# Altium PCB Supply_part.PcbDoc
Units mm, origin at the board's own origin, x right, y up, seen from the top; angles counter-clockwise.
Board outline 50 x 50 mm, 2 copper layers (Top Layer, Bottom Layer); 25 components, 34 nets, 112 pads, 1 vias.
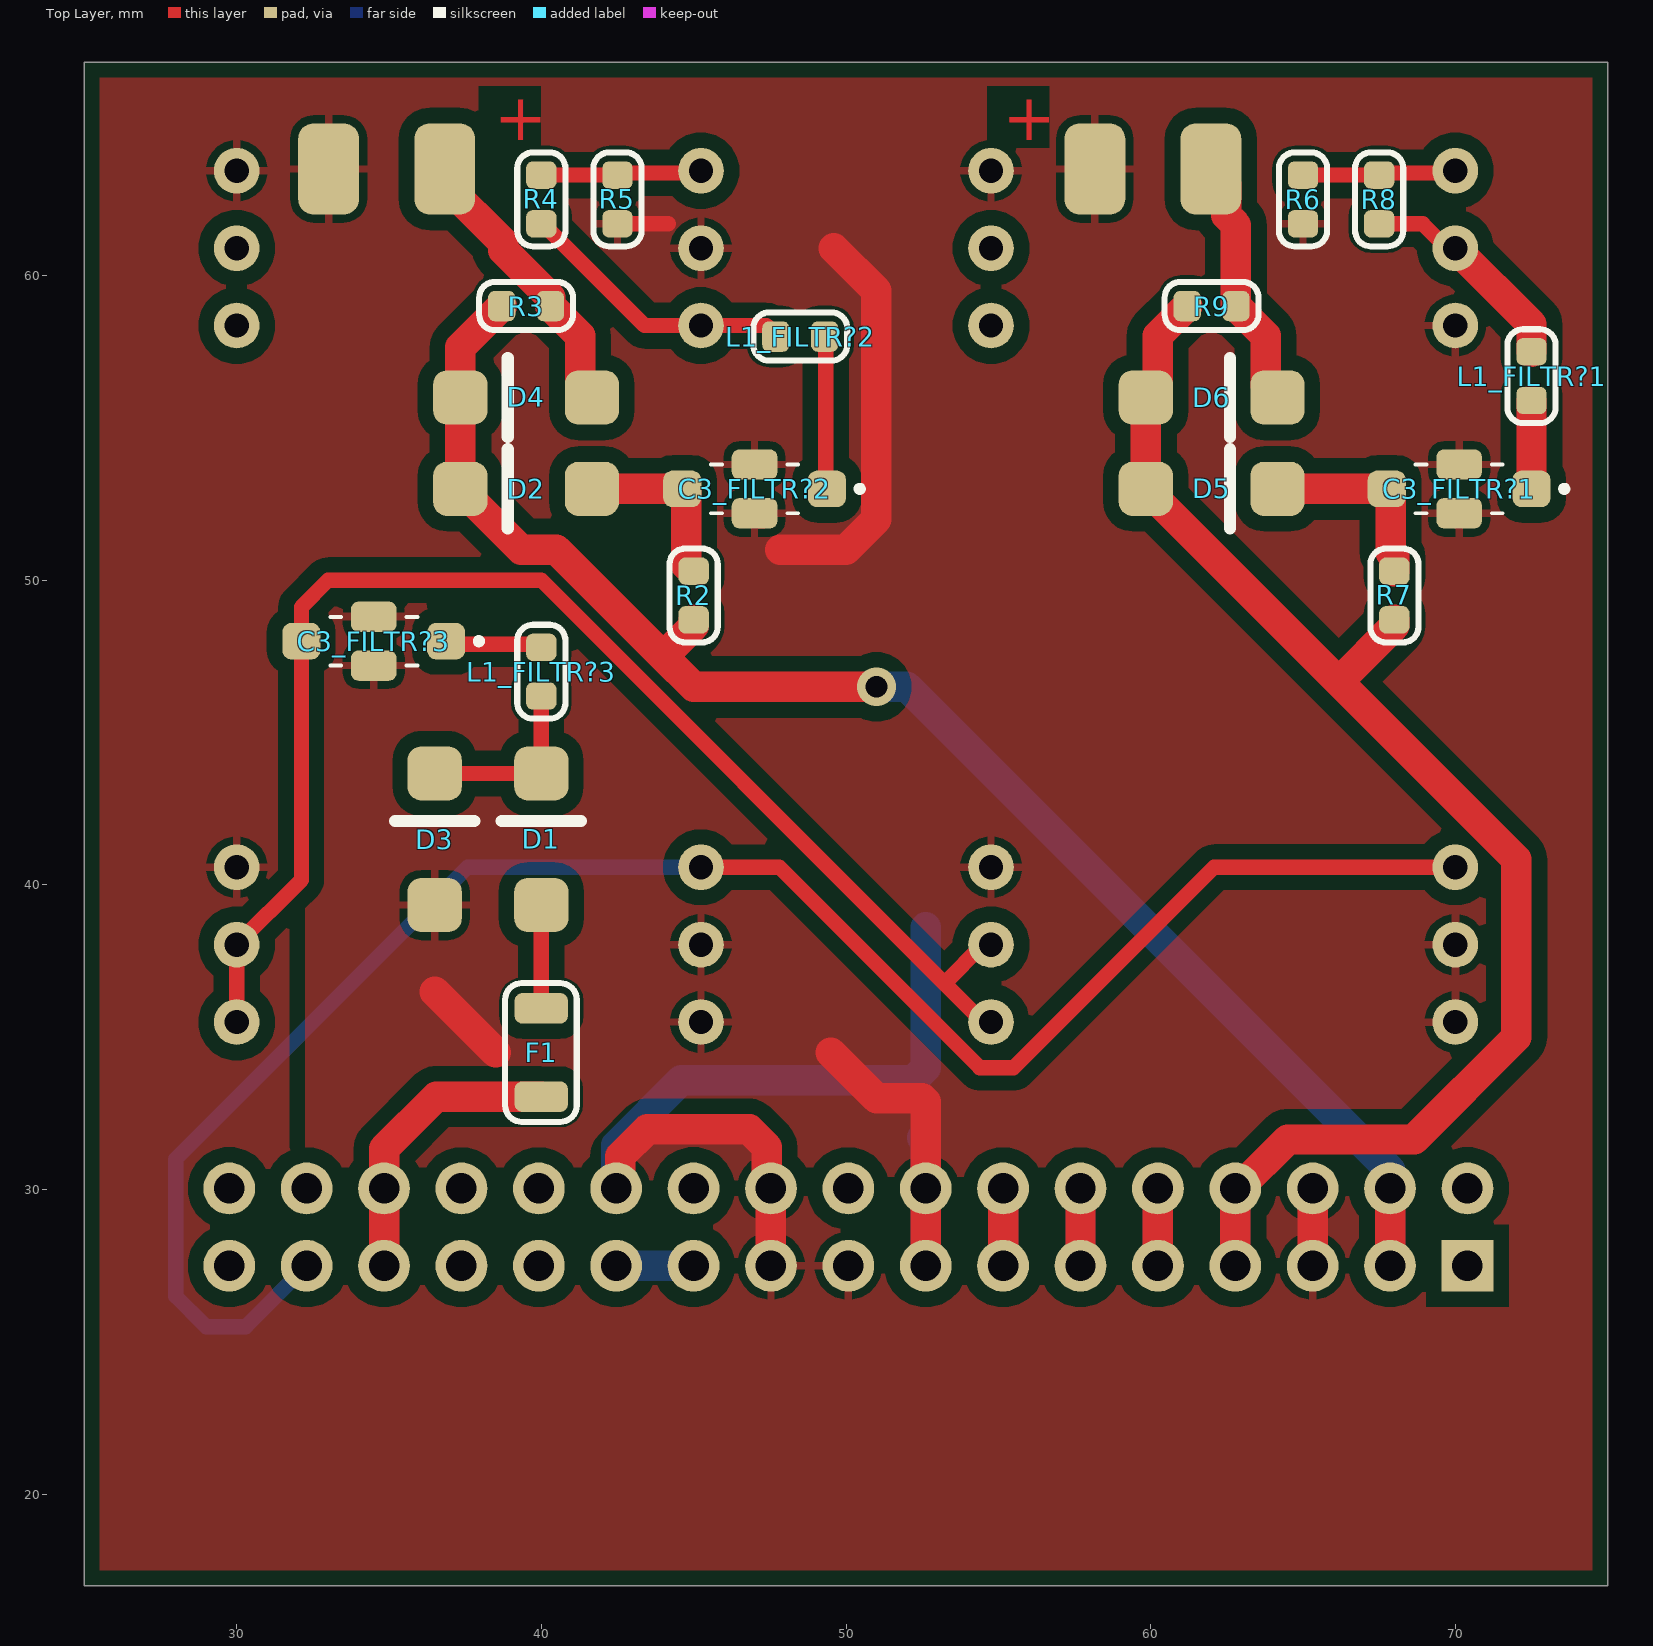
[diagram p0: Top Layer view]
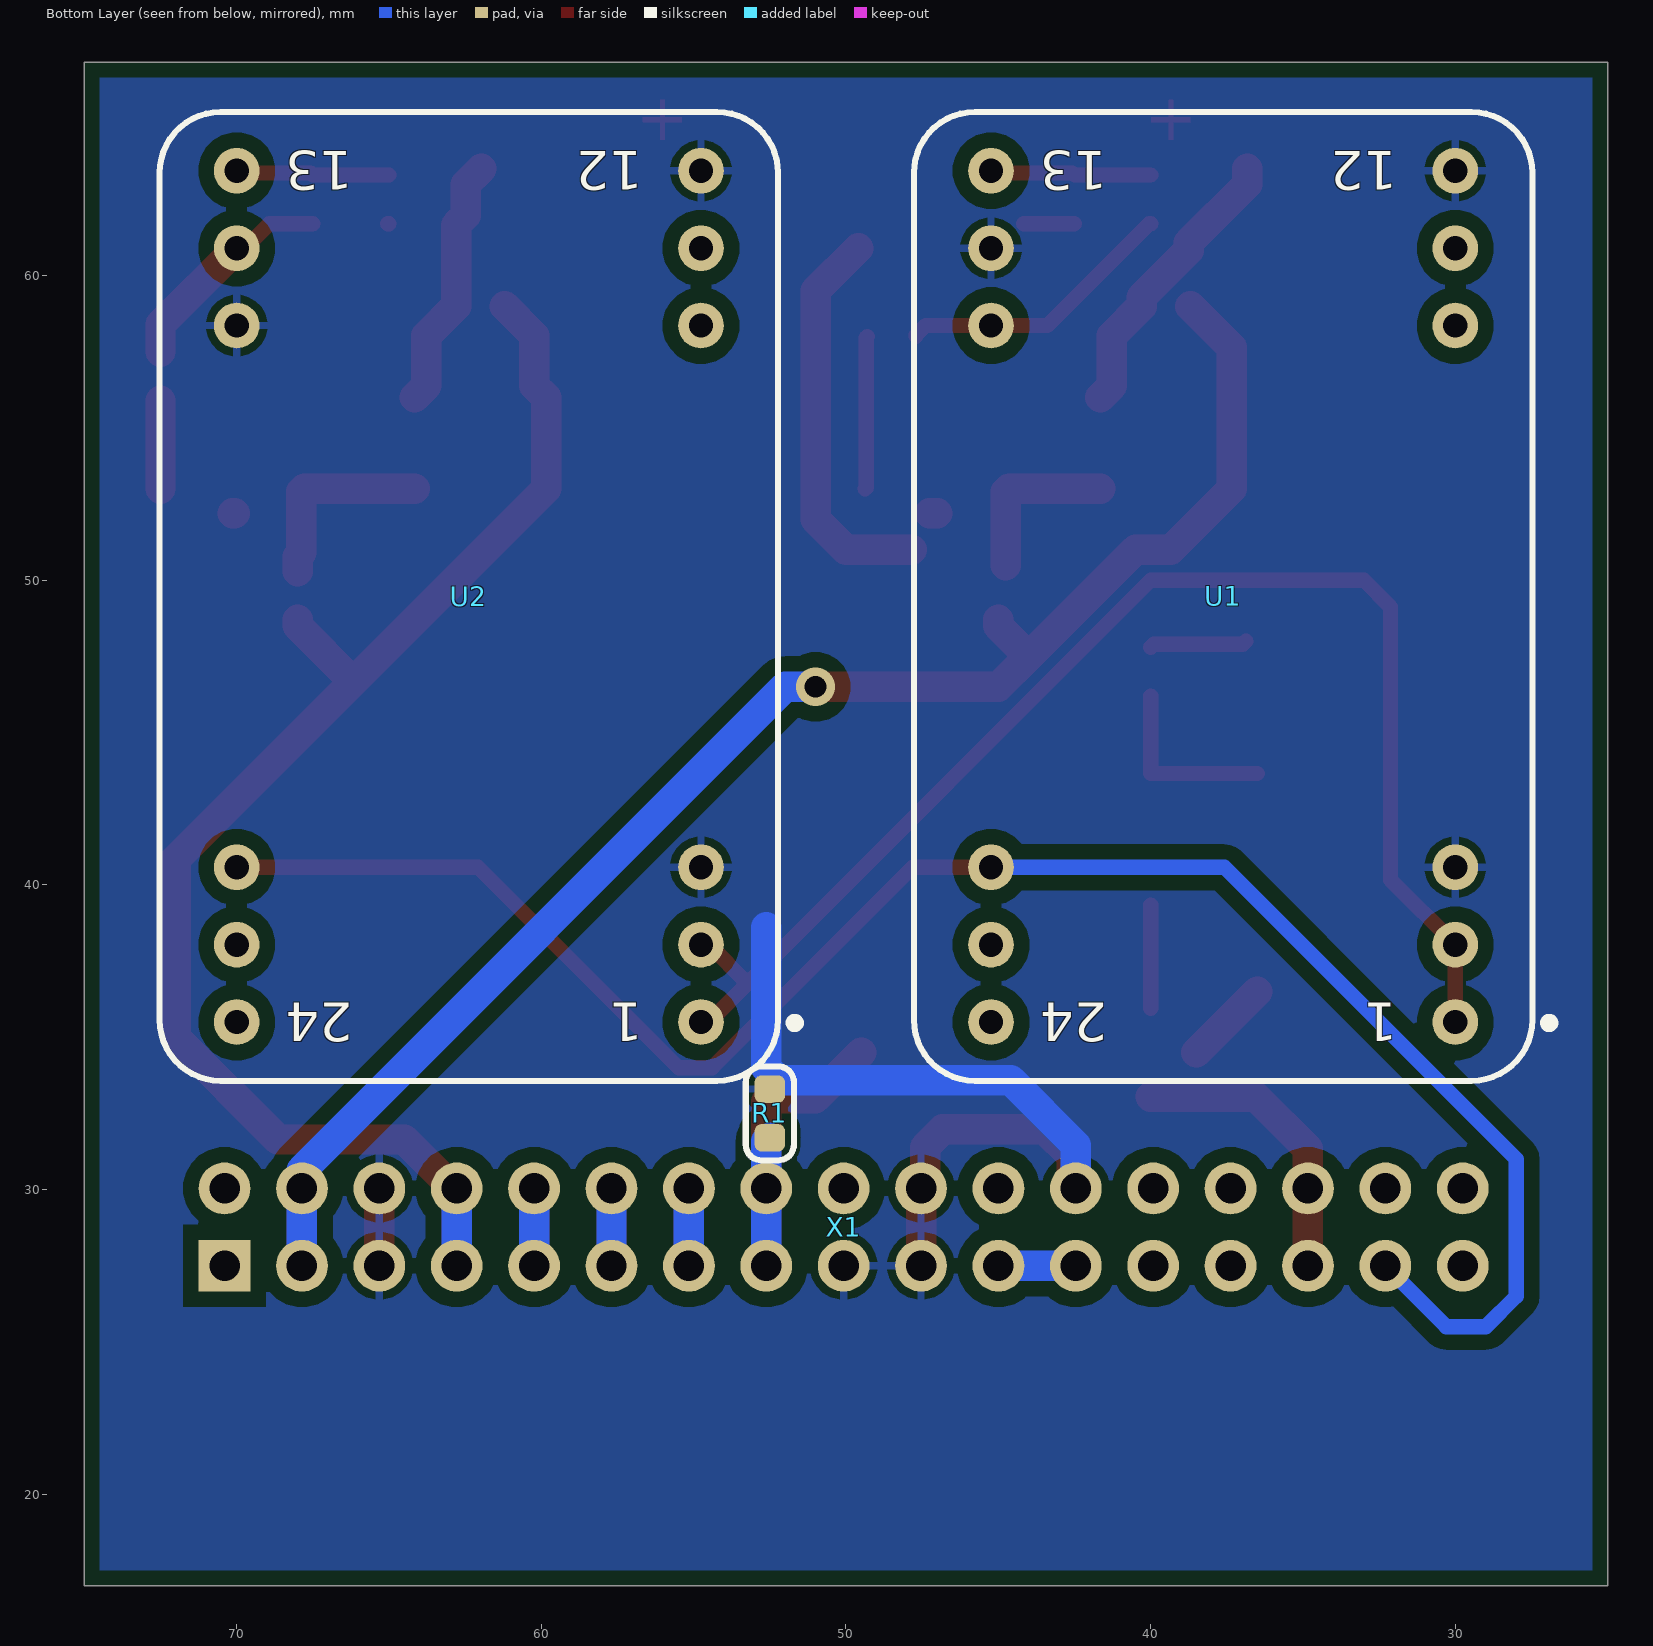
[diagram p1: Bottom Layer view, seen from below]
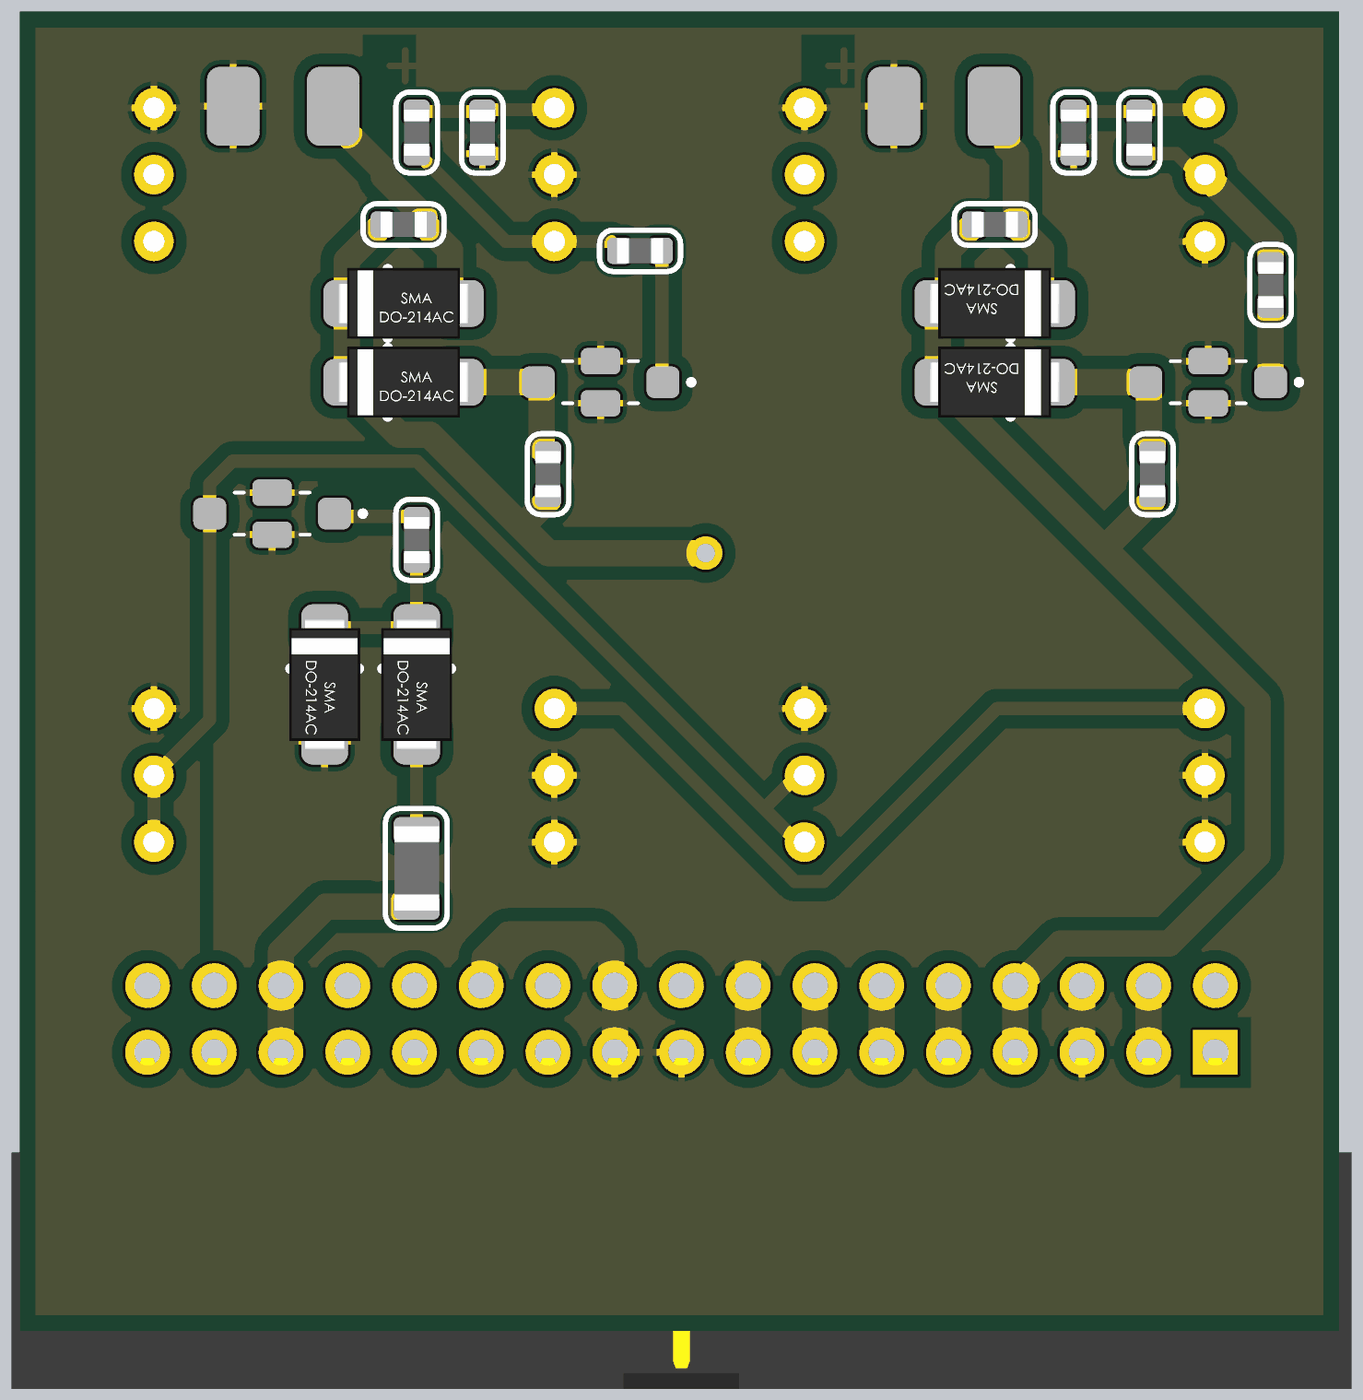
[diagram p2: 3D render of the assembled board from above, using the file's embedded part models]
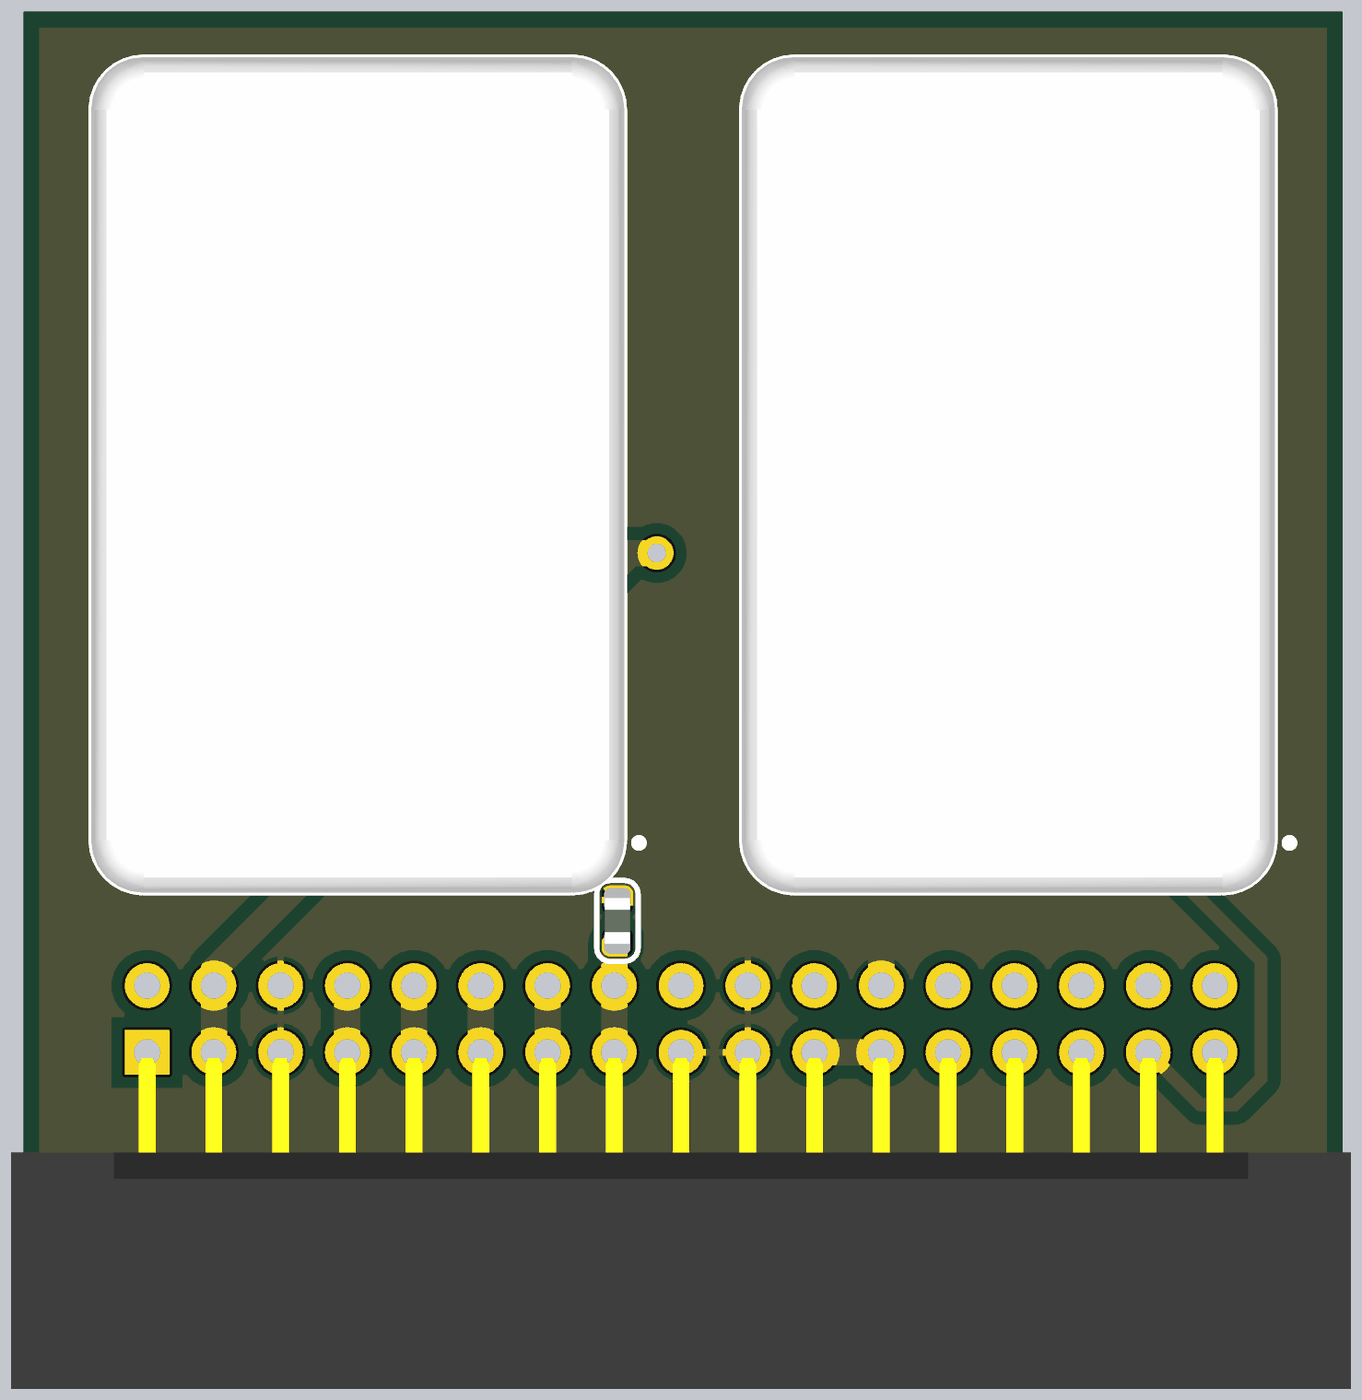
[diagram p3: 3D render of the assembled board from below, using the file's embedded part models]

## Layer stack, top to bottom
Top Solder: solder mask 0.0102, Solder Resist, Dk 3.5
Top Layer: signal copper 0.0356
Dielectric 1: dielectric 0.32, FR-4, Dk 4.8
Bottom Layer: signal copper 0.0356
Bottom Solder: solder mask 0.0102, Solder Resist, Dk 3.5

## Board outline
25,17 25,67 75,67 75,17

## Design rules (kind name [scope] priority, off if disabled: settings)
Clearance [All] p1: gap=0.254 ignorepadtopadclearanceinfootprint=FALSE except(0: Arc-Hole Track-Hole SMDPad-Hole THPad-Hole Via-Hole Fill-Hole Poly-Hole Region-Hole Text-Hole; 0.5: Arc-Poly Track-Poly SMDPad-Poly THPad-Poly Via-Poly Fill-Poly Poly-Poly)
PolygonConnect [All] p1: connectstyle=Relief reliefconductorwidth=0.254 reliefentries=4 polygonreliefangle="90 Angle" airgapwidth=0.254
RoutingVias [All] p1: holewidth=0.711 width=1.27 viastyle="Through Hole" minholewidth=0.711 minwidth=1.27 maxholewidth=0.711 maxwidth=1.27
SolderMaskExpansion [All] p1: expansion=0.102 istentingtop=FALSE
Width [All] p1: maxlimit=2 minlimit=0.3 preferedwidth=0.5
30 further rules are at their usual default settings.

## Classes and differential pairs
channel class supply_filter: FILTR?1 FILTR?2 FILTR?3
component class main: C1 C2 D1 D2 D3 D4 D5 D6 F1 R1 R2 R3 R4 R5 R6 R7 R8 R9 U1 U2 X1
component class FILTR?3: C3_FILTR?3 L1_FILTR?3
component class FILTR?2: C3_FILTR?2 L1_FILTR?2
component class FILTR?1: C3_FILTR?1 L1_FILTR?1

## Components (designator, comment, footprint, x,y, rotation, side; value= is the part's Value field where it differs from the comment)
C3_FILTR?1 "NFM41PC155B1E3L" FIL_NFM41PC155B1E3L 70.125,53 r180 top (schematic designator C3)
C3_FILTR?2 "NFM41PC155B1E3L" FIL_NFM41PC155B1E3L 47,53 r180 top (schematic designator C3)
C3_FILTR?3 "NFM41PC155B1E3L" FIL_NFM41PC155B1E3L 34.5,48 r180 top (schematic designator C3)
D1 "VS-15MQ040" "DO-214AC (SMA)" 40,41.5 r90 top
D2 "VS-15MQ040" "DO-214AC (SMA)" 39.5,53 r180 top
D3 "VS-15MQ040" "DO-214AC (SMA)" 36.5,41.5 r90 top
D4 "VS-15MQ040" "DO-214AC (SMA)" 39.5,56 r180 top
D5 "VS-15MQ040" "DO-214AC (SMA)" 62,53 r0 top
D6 "VS-15MQ040" "DO-214AC (SMA)" 62,56 r0 top
F1 "MF-NSMF035" RES_1206 40,34.5 r90 top
L1_FILTR?1 "BLM18SG700TN1D" RES_0603 72.5,56.7 r90 top (schematic designator L1)
L1_FILTR?2 "BLM18SG700TN1D" RES_0603 48.5,58 r180 top (schematic designator L1)
L1_FILTR?3 "BLM18SG700TN1D" RES_0603 40,47 r270 top (schematic designator L1)
R1 "0" RES_0603 52.5,32.5 r90 bottom
R2 "0" RES_0603 45,49.5 r270 top
R3 "50" RES_0603 39.5,59 r0 top
R4 "10k" RES_0603 40,62.5 r90 top
R5 "10k" RES_0603 42.5,62.5 r270 top
R6 "10k" RES_0603 65,62.5 r90 top
R7 "0" RES_0603 68,49.5 r270 top
R8 "10k" RES_0603 67.5,62.5 r270 top
R9 "50" RES_0603 62,59 r0 top
U1 "TWN 5" DCDC_TVN 37.62,49.47 r90 bottom
U2 "TWN 5" DCDC_TVN 62.38,49.47 r90 bottom
X1 "?" BH-34 70.397,30.04 r180 bottom

## Footprints (in the part's own frame and the unit in brackets; to place one, negate y for a bottom-side part, rotate by r counter-clockwise, add the part's x,y. Pads: shape width x height; smd on the part's side, far side on the other; paste and mask are expansions set on the pad)
BH-34 [mm]
  rect 1.7x1.7 hole 1: 1(0,-2.54)
  round 1.7 hole 1: 2(0,0) 3(2.54,-2.54) 4(2.54,0) 5(5.08,-2.54) 6(5.08,0) 7(7.62,-2.54) 8(7.62,0) 9(10.16,-2.54) 10(10.16,0) 11(12.7,-2.54) 12(12.7,0) 13(15.24,-2.54) 14(15.24,0) 15(17.78,-2.54) 16(17.78,0) 17(20.32,-2.54) 18(20.32,0) 19(22.86,-2.54) 20(22.86,0) 21(25.4,-2.54) 22(25.4,0) 23(27.94,-2.54) 24(27.94,0) 25(30.48,-2.54) 26(30.48,0) 27(33.02,-2.54) 28(33.02,0) 29(35.56,-2.54) 30(35.56,0) 31(38.1,-2.54) 32(38.1,0) 33(40.64,-2.54) 34(40.64,0)
  body extent -5.17,-15.35 45.81,-2.75, height 8.67
DCDC_TVN [mm] "JTB03 Series , Body 31.8x20.3mm, Pitch 2.54mm"
  round 1.5 hole 0.8: 1(-13.97,-7.62) 2(-11.43,-7.62) 3(-8.89,-7.62) 10(8.89,-7.62) 11(11.43,-7.62) 12(13.97,-7.62) 13(13.97,7.62) 14(11.43,7.62) 15(8.89,7.62) 22(-8.89,7.62) 23(-11.43,7.62) 24(-13.97,7.62)
  silkscreen extent -15.9,-10.85 15.9,10.15, body extent -15.9,-10.15 15.9,10.15, height 10.2
"DO-214AC (SMA)" [mil] "DO-214-AC/SMA; 2 C-Bend Leads; Body 5 x 2.7 mm, inc. leads (LxW)"
  rrect50% 70x70 smd: 1(-85,0) 2(85,0)
  silkscreen extent 24,-51 24,51, body extent -98,-53 98,53, height 85
FIL_NFM41PC155B1E3L [mm]
  rrect50% 1.25x1.2 smd: 1(-2.375,0) 3(2.375,0)
  rrect50% 1.5x1 smd: 2(0,0.8) 2(0,-0.8)
  silkscreen extent -3.55,-0.8 1.43,0.8
RES_0603 [mm] "Chip Resistor, EIA 0603, Metric 1608, Body 1.6x0.8mm, IPC Medium Density"
  rrect50% 0.9x1 smd: 1(-0.8,0) 2(0.8,0)
  silkscreen extent -1.54,-0.79 1.54,0.79, body extent -0.87,-0.47 0.88,0.48, height 0.55
RES_1206 [mm] "Chip Resistor, EIA 1206, Metric 3016, Body 3.05x1.55mm, IPC Medium Density"
  rrect50% 1x1.75 smd: 1(-1.45,0) 2(1.45,0)
  silkscreen extent -2.27,-1.16 2.27,1.19, body extent -1.6,-0.85 1.6,0.85, height 0.65

## Part data
C3_FILTR?1 C3_FILTR?2 C3_FILTR?3: library part Capacity_filtr, "Емкостной фильтр проходной"
D1 D2 D3 D4 D5 D6: library part MBR0520, "Диод Шоттки", HelpURL=C:\Datasheets\MBR0520.pdf, MarkPCB=AYWLC, ValueBOM=MBR0520, ValueSCH=MBR0520
F1: library part MF-NSMFxxx, "Предохранитель самовосстанавливаемый", HelpURL=C:\Datasheets\MF-NSMF.pdf, ValueBOM=MF-NSMFxxx, ValueSCH=MF-NSMFxxx
L1_FILTR?1 L1_FILTR?2 L1_FILTR?3: library part FERRITE_BEAD, "Дроссель ЭМП", ValueBOM=SDR0403-101k, ValueSCH=100u, HelpURL=C:\Datasheets\SRD0403.pdf, MarkPCB=101
R1 R2 R3 R7 R9: library part Resisitor, "Резистор", ValueBOM="0805 10k 0.125", ValueSCH=10k, MarkPCB=103
R4 R5 R6 R8: library part Resisitor, "Резистор", ValueBOM="0805 10k 0.125", MarkPCB=103, ValueSCH=10k
U1 U2: "DC/DC модуль питания"
X1: library part "Connector 17x2", ValueSCH=Model

## Free pads (board coordinates)
  rrect50% 2x3 smd: 29(33.02,63.5) 29(36.83,63.5) 29(58.166,63.5) 29(61.976,63.5)

## Via types
v1: diameter 1.27, hole 0.711, Top Layer to Bottom Layer, 1 vias

## Nets (pads, with @x,y where several pads share a name; then routed paths per layer and width w, separated by ;. In a path a pad name is that pad's centre, name@x,y a point inside that pad or via, vN(x,y) a via of type N, cw(c..) or ccw(c..) an arc to the next point about the centre after c; other vN are vias at no path point)
!SHDN: U1.22 U2.22 X1.31 | length 61.5
  Top Layer w0.5: U1.22 47.812,40.58 54.392,34 55.5,34 62.08,40.58 U2.22
  Bottom Layer w0.5: X1.31 30.297,25.5 29,25.5 28,26.5 28,31 37.58,40.58 U1.22
+2.5VREF: X1.2
+3.3V: X1.9 X1.10 | length 5.1
  Top Layer w1: X1.9 X1.10
  Bottom Layer w1: X1.9 X1.10
+5V: D2.2 D4.2 R2.2 R3.1 X1.3 X1.4 | length 53.6
  Top Layer w1: R3.1 37.341,57.641 D4.2 D2.2 39.337,51.004 40.496,51.004 44,47.5 ; R2.2 45,48.5 44,47.5 ; v1(51,46.5) 45,46.5 44,47.5 ; X1.3 X1.4
  Bottom Layer w1: v1(51,46.5) 52,46.5 67.857,30.643 X1.4 X1.3
+9_36V: F1.1 X1.29 X1.30 | length 9.8
  Top Layer w0.5: F1.1@39.959,33.009 F1.1
  Top Layer w1: X1.29 X1.30 34.837,31.337 36.55,33.05 F1.1
-2.5VREF: X1.1
-5V: D5.1 D6.1 R7.2 R9.1 X1.7 X1.8 | length 48.7
  Top Layer w1: R9.1 60.23,58.03 60.23,56.389 D6.1 D5.1 66.171,46.671 ; X1.7 X1.8 62.893,30.04 64.497,31.644 68.644,31.644 72,35 72,40.841 67.341,45.5 66.171,46.671 ; R7.2 68,48.5 66.171,46.671
  Bottom Layer w1: X1.7 X1.8
EXT_GAIN: X1.33
GND: C3_FILTR?1.2 C3_FILTR?2.2 pad.29@33.02,63.5 pad.29@58.166,63.5 R1.2 R5.2 R6.1 U1.3 U1.12 U1.14 U2.3 U2.12 U2.15 X1.5 X1.6 X1.17 X1.19 X1.20 X1.24 | length 45.9
  Top Layer w0.5: R5.2 44.169,61.7 ; U1.14@44.969,60.9 U1.14 ; R6.1 R6.1@65.05,61.7
  Top Layer w1: X1.24 42.591,30.174 42.591,31.091 43.483,31.983 46.817,31.983 47.403,31.398 47.403,30.174 X1.20 X1.19 ; C3_FILTR?2.2@47,52.2 C3_FILTR?2.2@47.25,52.2 ; 47.836,51 50,51 51,52 51,59.5 49.6,60.9 ; X1.5 X1.6 ; U2.15 U2.15@70.062,58.298 ; C3_FILTR?1.2@70.062,52.2 C3_FILTR?1.2@70.125,52.2
  Bottom Layer w1: X1.24 42.457,31.457 44.586,33.586 47.537,33.586 52.203,33.586 52.617,34 52.617,38.617 ; U2.3@54.625,40.58 U2.3
GND_IN: C3_FILTR?3.2 D3.1 R1.1 U1.23 U1.24 U2.23 U2.24 X1.15 X1.16 | length 18.9
  Top Layer w1: 36.5,36.5 38.5,34.5 ; U1.24@45.144,35.404 U1.24 ; 49.5,34.5 51.004,32.996 52.5,32.996 52.617,32.879 X1.15 X1.16
  Bottom Layer w1: R1.1 52.617,31.583 X1.16 X1.15
HV: X1.22
HV_COVER: X1.21 X1.23 | length 2.5
  Bottom Layer w1: X1.23 X1.21
NetC1_1: D4.1 pad.29@36.83,63.5 R3.2 | length 9.5
  Top Layer w1: pad.29@36.83,63.5 36.83,63 38.746,61.084 38.746,60.839 40.3,59.285 R3.2 41.27,58.03 41.27,56.389 D4.1
NetC2_2: D6.2 pad.29@61.976,63.5 R9.2 | length 8.4
  Top Layer w1: pad.29@61.976,63.5 62.476,63 62.476,61.984 62.8,61.66 R9.2 63.77,58.03 63.77,56.389 D6.2
NetC3_FILTR?1_1: C3_FILTR?1.1 L1_FILTR?1.1 | length 2.9
  Top Layer w1: C3_FILTR?1.1 L1_FILTR?1.1
NetC3_FILTR?1_3: C3_FILTR?1.3 D5.2 R7.1 | length 6.4
  Top Layer w1: D5.2 C3_FILTR?1.3 67.775,53 67.875,52.9 67.875,50.9 68,50.775 R7.1
NetC3_FILTR?2_1: C3_FILTR?2.1 L1_FILTR?2.1 | length 5
  Top Layer w0.5: L1_FILTR?2.1 49.338,57.963 49.338,53.037 C3_FILTR?2.1
NetC3_FILTR?2_3: C3_FILTR?2.3 D2.1 R2.1 | length 5.5
  Top Layer w1: D2.1 C3_FILTR?2.3 44.65,53 44.75,52.9 R2.1@44.75,50.5
NetC3_FILTR?3_1: C3_FILTR?3.1 L1_FILTR?3.1 | length 3.2
  Top Layer w0.5: C3_FILTR?3.1 36.975,47.9 39.9,47.9 L1_FILTR?3.1
NetC3_FILTR?3_3: C3_FILTR?3.3 U1.1 U1.2 U2.1 U2.2 | length 45.6
  Top Layer w0.5: U1.1 U1.2 32.125,40.165 C3_FILTR?3.3 32.125,49.125 33,50 40,50 53.23,36.77 ; U2.1 54.5,35.5 53.23,36.77 ; U2.2 54.5,38.04 53.23,36.77
NetD1_1: D1.1 F1.2 | length 3.4
  Top Layer w0.5: F1.2 D1.1
NetD1_2: D1.2 D3.2 L1_FILTR?3.2 | length 6
  Top Layer w0.5: D3.2 D1.2 L1_FILTR?3.2
NetL1_FILTR?1_2: L1_FILTR?1.2 R8.2 U2.14 | length 7.3
  Top Layer w0.5: R8.2 68.929,61.7 69.729,60.9 U2.14
  Top Layer w1: U2.14 72.5,58.4 L1_FILTR?1.2
NetL1_FILTR?2_2: L1_FILTR?2.2 R4.1 U1.15 | length 9.3
  Top Layer w0.5: R4.1 40.05,61.7 43.39,58.36 U1.15 47.39,58.36 47.7,58.05 L1_FILTR?2.2
NetR4_2: R4.2 R5.1 U1.13 | length 5.3
  Top Layer w0.5: R4.2 R5.1 42.57,63.37 45.17,63.37 U1.13
NetR6_2: R6.2 R8.1 U2.13 | length 5.1
  Top Layer w0.5: R6.2 R8.1 67.57,63.37 69.93,63.37 U2.13
RT2: X1.18
TEC+: X1.13 X1.14 | length 5.1
  Top Layer w1: X1.13 X1.14
  Bottom Layer w1: X1.13 X1.14
TEC-: X1.11 X1.12 | length 5.1
  Top Layer w1: X1.11 X1.12
  Bottom Layer w1: X1.11 X1.12
TEC_CUR_SP1: X1.26
TEC_CUR_SP2: X1.25
TEMP_MEAS: X1.32
TEMP_SP1: X1.27
TEMP_SP2: X1.28
pads on no net: U1.10 U1.11 U2.10 U2.11 X1.34

## Polygon pours and split planes (outlines as drawn)
GND on Top Layer "NONET_L-01_P-001" (solid, remove dead copper, pour order 2): 74.5,66.5 74.5,17.5 25.5,17.5 25.5,66.5
GND_IN on Top Layer "NONET_L-01_P-001" (solid, remove dead copper, pour order 0): 32.258,30 71.628,30 71.628,40 50,40 40,50 32.258,50
GND on Bottom Layer "NONET_L-01_P-001" (solid, remove dead copper, pour order 1): 25.5,17.5 25.5,66.5 74.5,66.5 74.5,17.5

## Other copper
Top Layer:
  text "+" at 38.454,64.444 h1.52
  text "+" at 55.146,64.444 h1.52

## Silkscreen, mask and mechanical layers (free items; w line width, h text height)
Board:
  the board outline again, w0.2

## Text inside footprints (layer, text, board x,y; h text height)
U1: Mechanical 14 "1" at 31.905,36.135 h1.27 r180; Mechanical 14 "12" at 31.905,64.075 h1.27 r180; Mechanical 14 "13" at 41.43,64.075 h1.27 r180; Mechanical 14 "24" at 41.43,36.135 h1.27 r180; Bottom Overlay "1" at 31.905,36.135 h1.27 r180; Bottom Overlay "13" at 41.43,64.075 h1.27 r180; Bottom Overlay "24" at 41.43,36.135 h1.27 r180; Bottom Overlay "12" at 31.905,64.075 h1.27 r180
U2: Mechanical 14 "24" at 66.19,36.135 h1.27 r180; Mechanical 14 "13" at 66.19,64.075 h1.27 r180; Mechanical 14 "12" at 56.665,64.075 h1.27 r180; Mechanical 14 "1" at 56.665,36.135 h1.27 r180; Bottom Overlay "12" at 56.665,64.075 h1.27 r180; Bottom Overlay "24" at 66.19,36.135 h1.27 r180; Bottom Overlay "13" at 66.19,64.075 h1.27 r180; Bottom Overlay "1" at 56.665,36.135 h1.27 r180